# Altium PCB ST_ARD_V2.PcbDoc
Units mil, origin at the board's own origin, x right, y up, seen from the top; angles counter-clockwise.
Board outline 1870 x 2110 mil, 2 copper layers (Top Layer, Bottom Layer); 26 components, 26 nets, 121 pads, 4 vias.
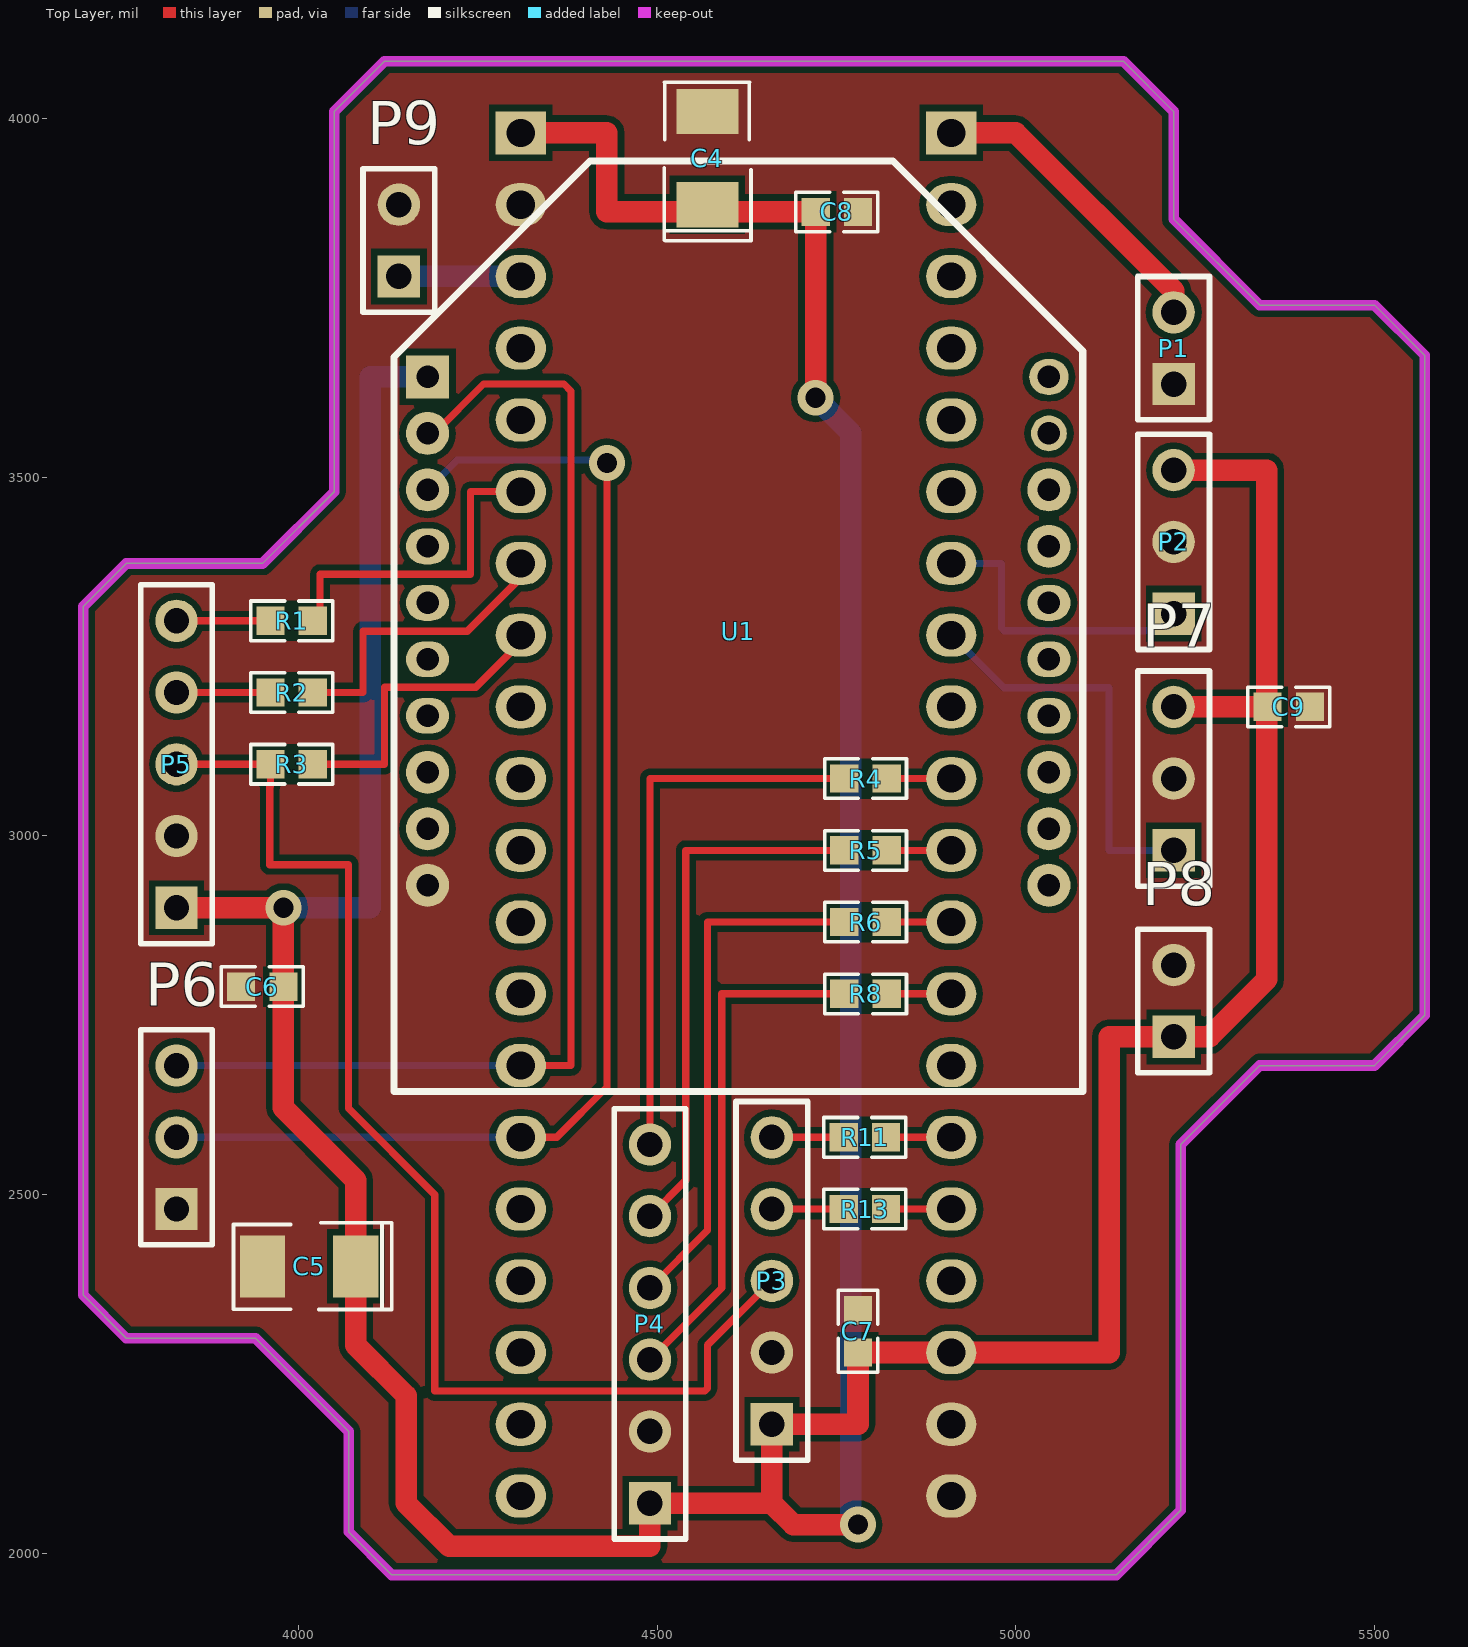
[diagram p0: Top Layer view]
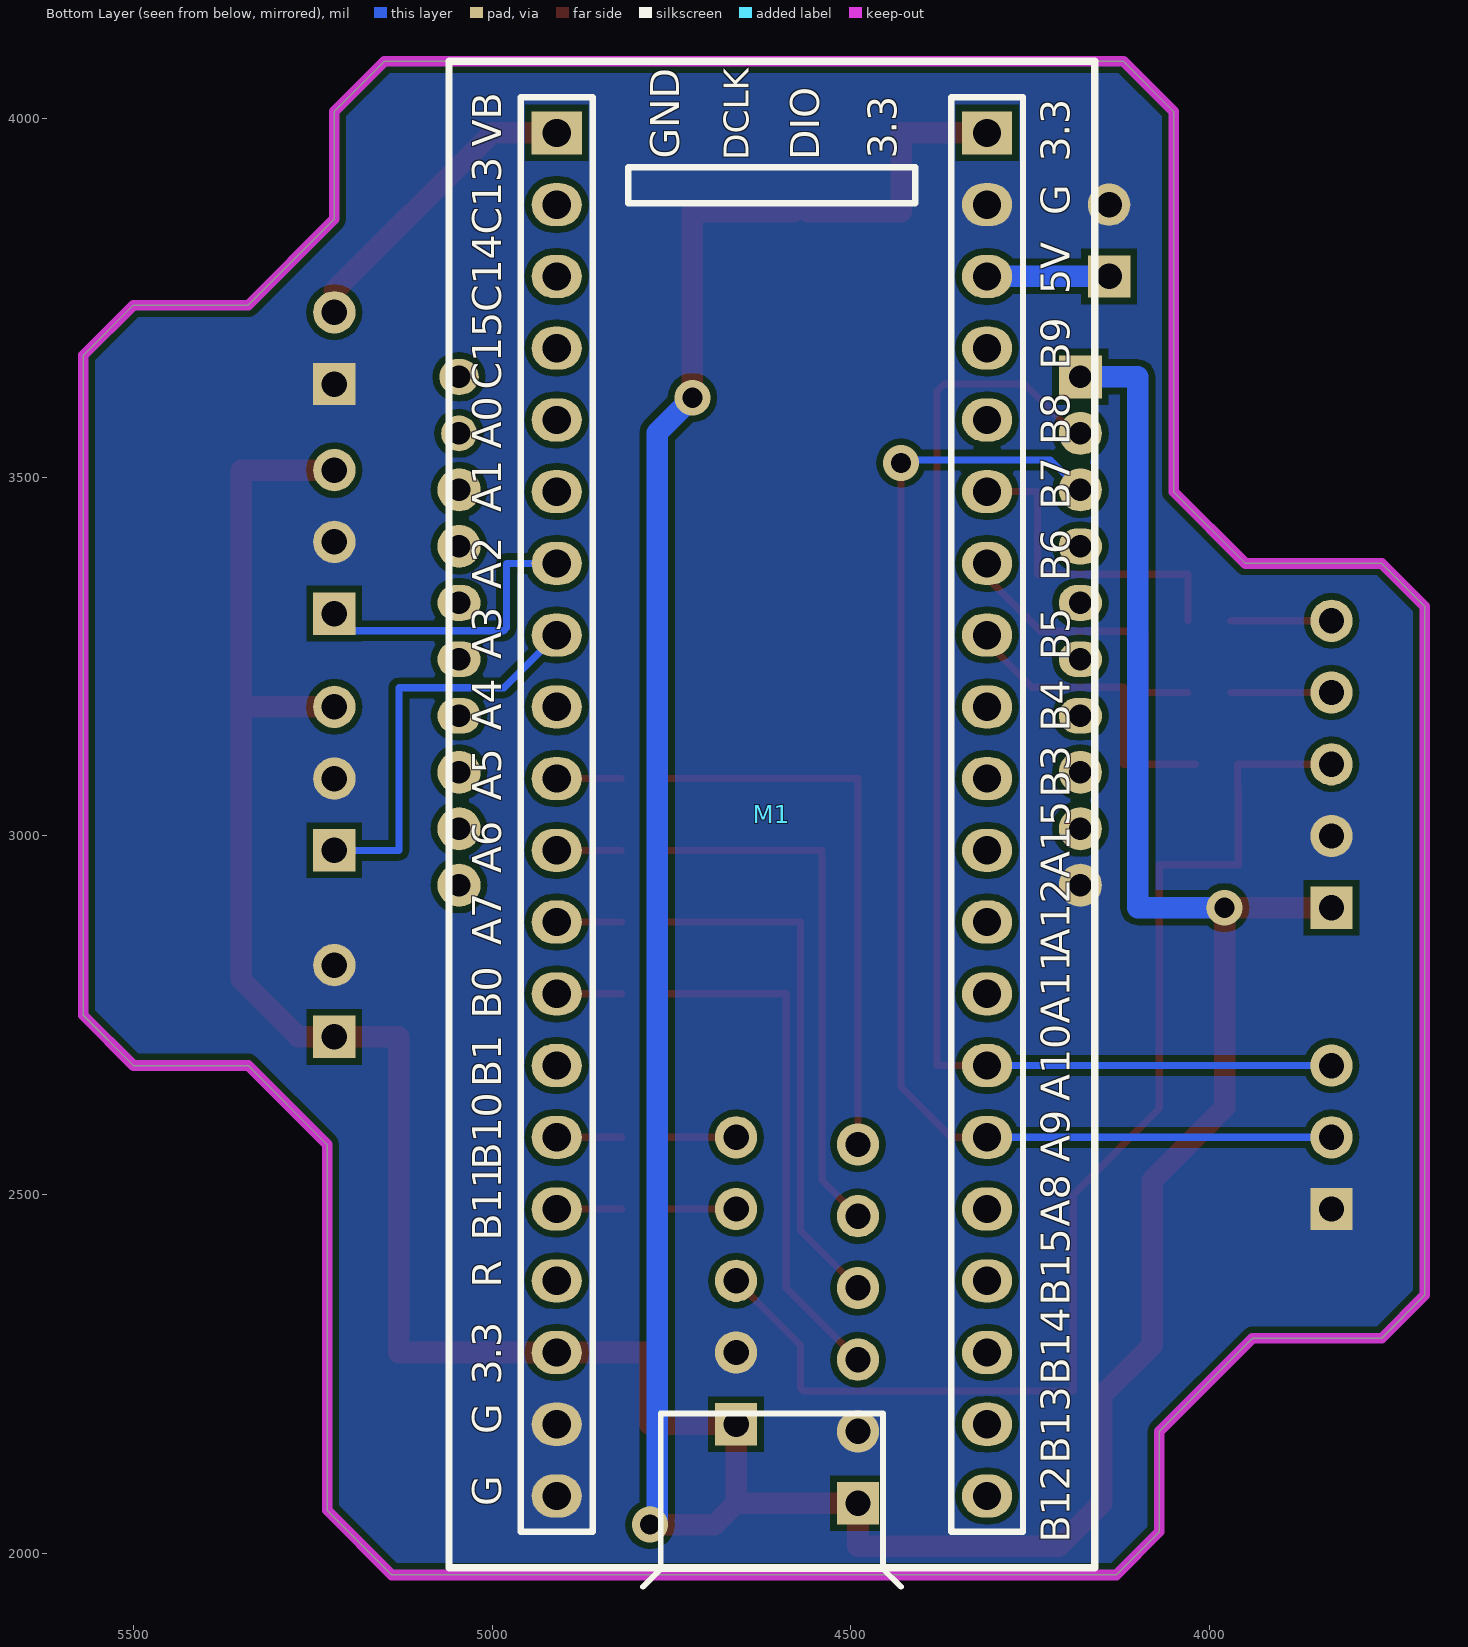
[diagram p1: Bottom Layer view, seen from below]

## Layer stack, top to bottom
Top Solder: solder mask 0.4, Solder Resist, Dk 3.5
Top Layer: signal copper 1.4
Dielectric 1: dielectric 12.6, FR-4, Dk 4.8
Bottom Layer: signal copper 1.4
Bottom Solder: solder mask 0.4, Solder Resist, Dk 3.5

## Board outline
3760,2300 3940,2300 4070,2170 4070,2030 4130,1970 5140,1970 5230,2060 5230,2570 5340,2680 5500,2680 5570,2750 5570,3670 5500,3740 5340,3740 5220,3860 5220,4010 5150,4080 4120,4080 4050,4010 4050,3480 3950,3380 3760,3380 3700,3320 3700,2360

## Design rules (kind name [scope] priority, off if disabled: settings)
Clearance [All] p1: gap=9 ignorepadtopadclearanceinfootprint=FALSE except(0: Arc-Hole Track-Hole SMDPad-Hole THPad-Hole Via-Hole Fill-Hole Poly-Hole Region-Hole Text-Hole)
PolygonConnect [All] p1: connectstyle=Direct reliefconductorwidth=10 reliefentries=4 polygonreliefangle="90 Angle" airgapwidth=10
RoutingVias [All] p1: holewidth=28 width=50 viastyle="Through Hole" minholewidth=28 minwidth=50 maxholewidth=28 maxwidth=50
SolderMaskExpansion [All] p1: expansion=4
Width [All] p1: maxlimit=10 minlimit=10 preferedwidth=10
30 further rules are at their usual default settings.

## Components (designator, comment, footprint, x,y, rotation, side; value= is the part's Value field where it differs from the comment)
C4 "33UF,16V" TANSMD-B 4570,3880 r180 top
C5 "33UF,16V" TANSMD-B 4080,2400 r270 top
C6 "100NF" 0603-S 3920,2790 r0 top
C7 "100NF" 0603-S 4780,2339.06 r270 top
C8 "100NF" 0603-S 4780,3870 r180 top
C9 "100NF" 0603-S 5410,3180 r180 top
M1 "Mini_STM32_Arduino" STM-32_ARDUINO 4910,3980 r180 bottom locked
P1 "Header 2" HDR1X2 5220,3630 r90 top
P2 "Header 3" HDR1X3 5220,3310 r90 top
P3 "Header 5" HDR1X5 4660,2180 r90 top
P4 "Header 6" HDR1X6 4490,2070 r90 top
P5 "Header 5" HDR1X5 3830,2900 r90 top
P6 "Header 3" HDR1X3 3830,2480 r90 top
P7 "Header 3" HDR1X3 5220,2980 r90 top
P8 "Header 2" HDR1X2 5220,2720 r90 top
P9 "Header 2" HDR1X2 4140,3780 r90 top
R1 "10" 0603-S 3960.95,3300 r0 top
R2 "10" 0603-S 3960.95,3200 r0 top
R3 "10" 0603-S 3960.94,3100 r0 top
R4 "10" 0603-S 4820,3080 r180 top
R5 "10" 0603-S 4820,2980 r180 top
R6 "10" 0603-S 4820,2880 r180 top
R8 "10" 0603-S 4820,2780 r180 top
R11 "10" 0603-S 4819.06,2580 r180 top
R13 "10" 0603-S 4819.06,2480 r180 top
U1 "XBEE" XBEE 4180,3640 r0 top locked

## Footprints (in the part's own frame and the unit in brackets; to place one, negate y for a bottom-side part, rotate by r counter-clockwise, add the part's x,y. Pads: shape width x height; smd on the part's side, far side on the other; paste and mask are expansions set on the pad)
0603-S [mm]
  rect 1x1 smd paste-1: 1(0,0) 2(1.5,0)
  silkscreen extent -0.7,-0.7 2.2,0.7
HDR1X2 [mm] "Connector; Header; 2 Position"
  rect 1.5x1.5 hole 0.9: 1(0,0)
  round 1.5 hole 0.9: 2(2.54,0)
  silkscreen extent -1.27,-1.27 3.81,1.27
HDR1X3 [mm] "Connector; Header; 3 Position"
  rect 1.5x1.5 hole 0.9: 1(0,0)
  round 1.5 hole 0.9: 2(2.54,0) 3(5.08,0)
  silkscreen extent -1.27,-1.27 6.35,1.27
HDR1X5 [mm] "Connector; Header; 5 Position"
  rect 1.5x1.5 hole 0.9: 1(0,0)
  round 1.5 hole 0.9: 2(2.54,0) 3(5.08,0) 4(7.62,0) 5(10.16,0)
  silkscreen extent -1.27,-1.27 11.43,1.27
HDR1X6 [mm] "Connector; Header; 6 Position"
  rect 1.5x1.5 hole 0.9: 1(0,0)
  round 1.5 hole 0.9: 2(2.54,0) 3(5.08,0) 4(7.62,0) 5(10.16,0) 6(12.7,0)
  silkscreen extent -1.27,-1.27 13.97,1.27
STM-32_ARDUINO [mil]
  rect 70x60 hole 39.37: 1(0,0) 40(600,0)
  oval 70x60 hole 39.37: 2(0,-100) 3(0,-200) 4(0,-300) 5(0,-400) 6(0,-500) 7(0,-600) 8(0,-700) 9(0,-800) 10(0,-900) 11(0,-1000) 12(0,-1100) 13(0,-1200) 14(0,-1300) 15(0,-1400) 16(0,-1500) 17(0,-1600) 18(0,-1700) 19(0,-1800) 20(0,-1900) 21(600,-1900) 22(600,-1800) 23(600,-1700) 24(600,-1600) 25(600,-1500) 26(600,-1400) 27(600,-1300) 28(600,-1200) 29(600,-1100) 30(600,-1000) 31(600,-900) 32(600,-800) 33(600,-700) 34(600,-600) 35(600,-500) 36(600,-400) 37(600,-300) 38(600,-200) 39(600,-100)
  silkscreen extent -150,-2027 750,100
TANSMD-B [mm]
  rect 2.2x1.6 smd paste-3: 1(0,0) 2(0,-3.3)
  silkscreen extent -1.55,-4.33 1.53,1.27
XBEE [mm]
  rect 1.524x1.524 hole 0.8: 1(0,0)
  round 1.524 hole 0.8: 2(0,-2) 3(0,-4) 8(0,-14) 9(0,-16) 10(0,-18) 11(22,-18) 12(22,-16) 13(22,-14) 17(22,-6) 18(22,-4)
  oval 1.524x1.27 hole 0.8: 4(0,-6) 5(0,-8) 6(0,-10) 7(0,-12) 14(22,-12) 15(22,-10) 16(22,-8)
  round 1.27 hole 0.8: 19(22,-2)
  oval 1.397x1.27 hole 0.8: 20(22,0)
  silkscreen extent -1.18,-25.3 23.2,7.64

## Part data
C4 C5: library part "CAPACITOR POL", "Capacitor", brand=AVX, MOQ/P=0.3, Stock Code="Stock Code", Stock ID=TPSB336M016R0350, U/P=1.2
C6 C7 C8 C9: library part CAP, "MLCC", brand=?, MOQ/P=0.004, Stock Code="Stock Code", Stock ID=06033C104KAT4A, U/P=0.1
P1 P8 P9: "Header, 2-Pin", LatestRevisionDate=17-Jul-2002, LatestRevisionNote="Re-released for DXP Platform.", Publisher="Altium Limited"
P2 P6 P7: "Header, 3-Pin", LatestRevisionDate=17-Jul-2002, LatestRevisionNote="Re-released for DXP Platform.", Publisher="Altium Limited"
P3 P5: "Header, 5-Pin", LatestRevisionDate=17-Jul-2002, LatestRevisionNote="Re-released for DXP Platform.", Publisher="Altium Limited"
P4: "Header, 6-Pin", LatestRevisionDate=17-Jul-2002, LatestRevisionNote="Re-released for DXP Platform.", Publisher="Altium Limited"
R1 R2 R3 R4 R5 R6 R8 R11 R13: library part R, "SMD Resistor", brand=ROHM, MOQ/P=0.02, Stock Code="Stock Code", Stock ID=RC0603FR-07220RL, U/P=0.1

## Via types
v1: diameter 50, hole 28, Top Layer to Bottom Layer, 4 vias

## Nets (pads, with @x,y where several pads share a name; then routed paths per layer and width w, separated by ;. In a path a pad name is that pad's centre, name@x,y a point inside that pad or via, vN(x,y) a via of type N, cw(c..) or ccw(c..) an arc to the next point about the centre after c; other vN are vias at no path point)
3.3V: C4.1 C5.1 C6.2 C7.2 C8.2 C9.2 M1.18 M1.40 P2.3 P3.1 P4.1 P5.1 P7.3 P8.1 U1.1 | length 7444
  Top Layer w10: C4.1@4560,3870 C4.1 C4.1@4580,3870
  Top Layer w30: P5.1 v1(3979.06,2900) C6.2 3979.06,2620.94 4080,2520 C5.1 4080,2290 4150,2220 4150,2070 4210,2010 4490,2010 P4.1 4660,2070 ; M1.40 4430,3980 4430,3870 C4.1@4560,3870 ; C4.1@4580,3870 C8.2 v1(4720.94,3610.94) ; v1(4780,2040) 4690,2040 4660,2070 ; P7.3 C9.2@5350,3180 ; P2.3 5350,3510 C9.2@5350,3180 ; 4660,2070 P3.1 4780,2180 C7.2 M1.18 5130,2280 5130,2720 P8.1 5270,2720 5350,2800 C9.2@5350,3180
  Bottom Layer w30: v1@3980,2900 4100,2900 4100,3640 U1.1 ; v1(4720.94,3610.94) 4770,3561.89 4770,2050 v1(4780,2040)
5V: M1.38 P9.1 | length 170
  Bottom Layer w30: P9.1 M1.38
CPI-CS: M1.13 R8.1 | length 90
  Top Layer w10: R8.1 M1.13
CPI-CS-IO: P3.3 P5.3 R3.1 | length 1733.3
  Top Layer w10: P5.3 R3.1 3960.94,3069.06 3960,3068.11 3960,2960 4070,2960 4070,2620 4190,2500 4190,2226.47 4566.47,2226.47 4570,2230 4570,2290 P3.3
GND: C4.2 C5.2 C6.1 C7.1 C8.1 C9.1 M1.19 M1.20 M1.39 P1.1 P2.2 P3.2 P4.2 P5.2 P6.1 P7.2 P8.2 P9.2 U1.10
I2C-CS: M1.33 R3.2 | length 433.3
  Top Layer w10: R3.2 4120,3100 4120,3207.3 4247.3,3207.3 4310,3270 M1.33
I2C-SCL1: M1.34 R2.2 | length 416.2
  Top Layer w10: R2.2@4030,3200 4090,3200 4090,3285.3 4235.3,3285.3 4310,3360 M1.34
I2C-SCL1-IO: P5.4 R2.1 | length 140.9
  Top Layer w10: P5.4 R2.1 R2.1@3970.94,3200
I2C-SCL2: M1.15 R11.1 | length 90.9
  Top Layer w10: R11.1 M1.15
I2C-SCL2-IO: P3.5 R11.2 | length 100
  Top Layer w10: P3.5 R11.2
I2C-SDA1: M1.35 R1.2 | length 460
  Top Layer w10: R1.2@4030,3300 4030,3364.78 4240,3364.78 4240,3480 M1.35
I2C-SDA1-IO: P5.5 R1.1 | length 140.9
  Top Layer w10: P5.5 R1.1 R1.1@3970.94,3300
I2C-SDA2: M1.16 R13.1 | length 90.9
  Top Layer w10: R13.1 M1.16
I2C-SDA2-IO: P3.4 R13.2 | length 100
  Top Layer w10: P3.4 R13.2
PA2: M1.7 P2.1 | length 411.6
  Bottom Layer w10: M1.7 4980,3380 4980,3290 4983.96,3286.04 5196.04,3286.04 P2.1
PA3: M1.8 P7.1 | length 567
  Bottom Layer w10: M1.8 4983.44,3206.56 5130,3206.56 5130,2980 P7.1
RXD-MCU: M1.27 P6.3 U1.2 | length 1732.6
  Top Layer w10: U1.2 4189.26,3561.26 4258,3630 4370,3630 4380,3620 4380,2680 M1.27
  Bottom Layer w10: P6.3@3820,2680 P6.3 M1.27
SPI-CS-IO: P4.3 R8.2 | length 722.4
  Top Layer w10: P4.3 4590,2370 4590,2780 R8.2
SPI-MISO: M1.11 R5.1 | length 90
  Top Layer w10: R5.1 M1.11
SPI-MISO-IO: P4.5 R5.2 | length 751.7
  Top Layer w10: P4.5 4540,2520 4540,2980 R5.2
SPI-MOSI: M1.12 R6.1 | length 90
  Top Layer w10: R6.1 M1.12
SPI-MOSI-IO: P4.4 R6.2 | length 734.1
  Top Layer w10: P4.4 4570,2450 4570,2880 R6.2
SPI-SCK: M1.10 R4.1 | length 90
  Top Layer w10: R4.1 M1.10
SPI-SCK-IO: P4.6 R4.2 | length 780.9
  Top Layer w10: P4.6 4490,3080 R4.2
TXD-MCU: M1.26 P6.2 U1.3 | length 1777.8
  Top Layer w10: M1.26 4360,2580 4430,2650 v1(4430,3520)
  Bottom Layer w10: P6.2@3820,2580 P6.2 M1.26 ; U1.3 4221.48,3524 4426,3524 v1(4430,3520)
VBAT: M1.1 P1.2 | length 431.1
  Top Layer w30: M1.1 5000,3980 5220,3760 P1.2
pads on no net: M1.2 M1.3 M1.4 M1.5 M1.6 M1.9 M1.14 M1.17 M1.21 M1.22 M1.23 M1.24 M1.25 M1.28 M1.29 M1.30 M1.31 M1.32 M1.36 M1.37 U1.4 U1.5 U1.6 U1.7 U1.8 U1.9 U1.11 U1.12 U1.13 U1.14 U1.15 U1.16 U1.17 U1.18 U1.19 U1.20

## Polygon pours and split planes (outlines as drawn)
GND on Bottom Layer "Bottom Layer-No Net" (solid, remove dead copper, pour order 2): 3710,4110 3720,4100 5590,4100 5590,1970 5610,1950 3700,1950 3700,4080 3720,4100
GND on Top Layer "Bottom Layer-No Net" (solid, remove dead copper, pour order 6): 3710,4110 3720,4100 5590,4100 5590,1970 5610,1950 3700,1950 3700,4080 3720,4100

## Keep-outs
Keep-Out Layer:
  the board outline again, w15

## Silkscreen, mask and mechanical layers (free items; w line width, h text height)
Mechanical 2:
  text "58}" at 4571.61,5375.79 h98.43
  text "39}" at 4571.61,5186.81 h98.43
  text "33}" at 4571.61,4938.78 h98.43
  text "20}" at 3820,2980 h98.43 r90
  text "58}" at 3260.59,2962.4 h98.43 r90
  text "64}" at 3044.05,2958.46 h98.43 r90
  text "89,5}" at 2453.5,2895.47 h98.43 r90
  text "76,5}" at 2772.4,2895.47 h98.43 r90
Mechanical 3:
  drawing of 2273 lines, arcs and shapes, not listed

## Text inside footprints (layer, text, board x,y; h text height)
M1: Bottom Overlay "GND" at 4739,3944 h40 r270; Bottom Overlay "DCLK" at 4642,3942 h35 r270; Bottom Overlay "DIO" at 4544,3942 h40 r270; Bottom Overlay "3.3" at 4436,3944 h40 r270; Bottom Overlay "R" at 4987,2370 h40 r270; Bottom Overlay "B11" at 4987,2436 h40 r270; Bottom Overlay "B10" at 4987,2535 h40 r270; Bottom Overlay "B1" at 4987,2650 h40 r270; Bottom Overlay "B0" at 4987,2745 h40 r270; Bottom Overlay "A0" at 4987,3540 h40 r270; Bottom Overlay "A1" at 4987,3451 h40 r270; Bottom Overlay "A2" at 4987,3344.29 h40 r270; Bottom Overlay "A3" at 4987,3246.43 h40 r270; Bottom Overlay "A4" at 4987,3147 h40 r270; Bottom Overlay "A5" at 4987,3049 h40 r270; Bottom Overlay "A6" at 4987,2948 h40 r270; Bottom Overlay "C15C14C13" at 4987,3622 h40 r270; Bottom Overlay "A7" at 4987,2848 h40 r270; Bottom Overlay "VB" at 4987,3961 h40 r270; Bottom Overlay "3.3" at 4987,2235 h40 r270; Bottom Overlay "G" at 4987,2166 h40 r270; Bottom Overlay "G" at 4987,2066 h40 r270; Bottom Overlay "B12" at 4195,2015 h40 r270; Bottom Overlay "B13" at 4195,2125 h40 r270; Bottom Overlay "B14" at 4195,2235 h40 r270; Bottom Overlay "B15" at 4195,2345 h40 r270; Bottom Overlay "A8" at 4195,2455 h40 r270; Bottom Overlay "A9" at 4195,2545 h40 r270; Bottom Overlay "A10" at 4195,2630 h40 r270; Bottom Overlay "A11" at 4195,2738 h40 r270; Bottom Overlay "A12" at 4195,2833 h40 r270; Bottom Overlay "A15" at 4195,2941 h40 r270; Bottom Overlay "B3" at 4195,3053 h40 r270; Bottom Overlay "B4" at 4195,3145 h40 r270; Bottom Overlay "B5" at 4195,3245 h40 r270; Bottom Overlay "B6" at 4195,3355 h40 r270; Bottom Overlay "B7" at 4195,3455 h40 r270; Bottom Overlay "B8" at 4195,3545 h40 r270; Bottom Overlay "B9" at 4195,3650 h40 r270; Bottom Overlay "5V" at 4195,3755 h40 r270; Bottom Overlay "G" at 4195,3865 h40 r270; Bottom Overlay "3.3" at 4195,3940 h40 r270